# Altium PCB moveWiFi.PcbDoc
Units mil, origin at the board's own origin, x right, y up, seen from the top; angles counter-clockwise.
Board outline 2372.23 x 2949.09 mil, 2 copper layers (Top Layer, Bottom Layer); 30 components, 22 nets, 155 pads, 15 vias.
Unrouted connection lines stored in the file: 92.
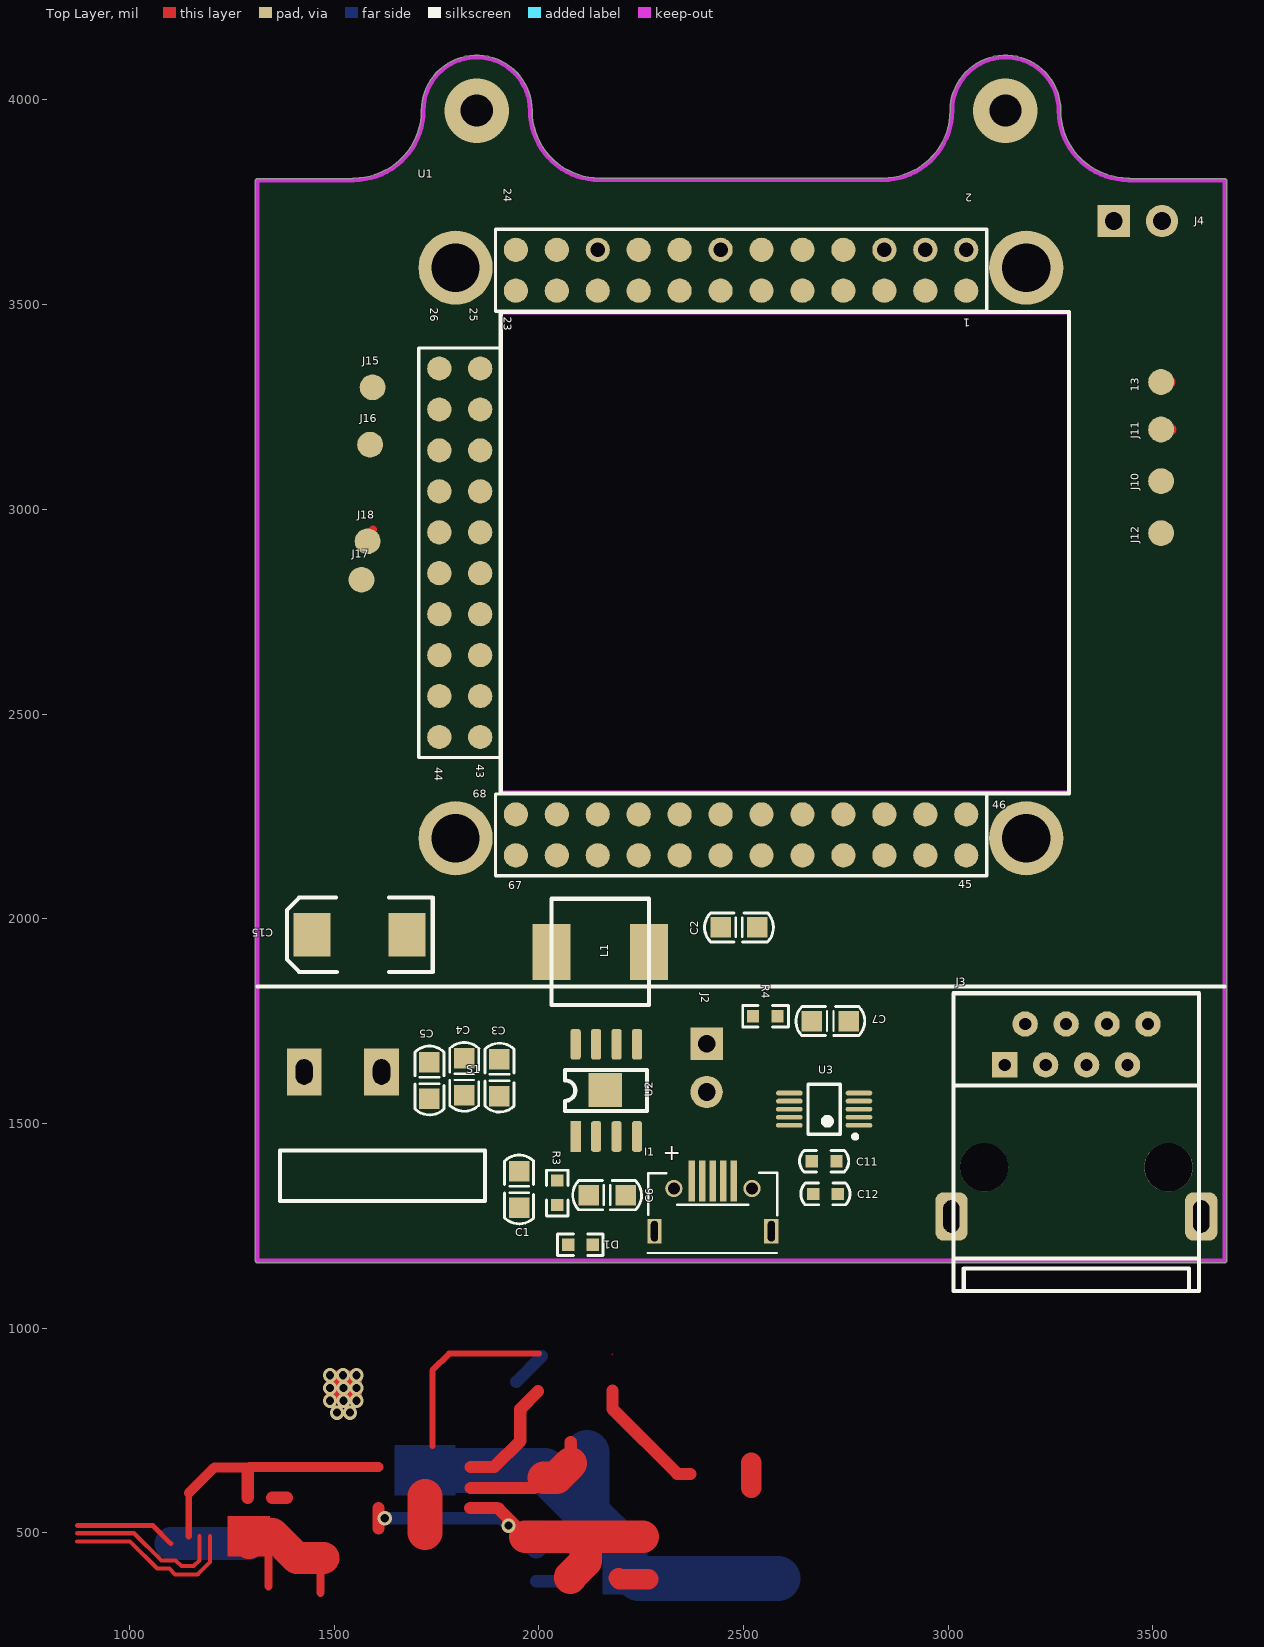
[diagram p0: Top Layer view]
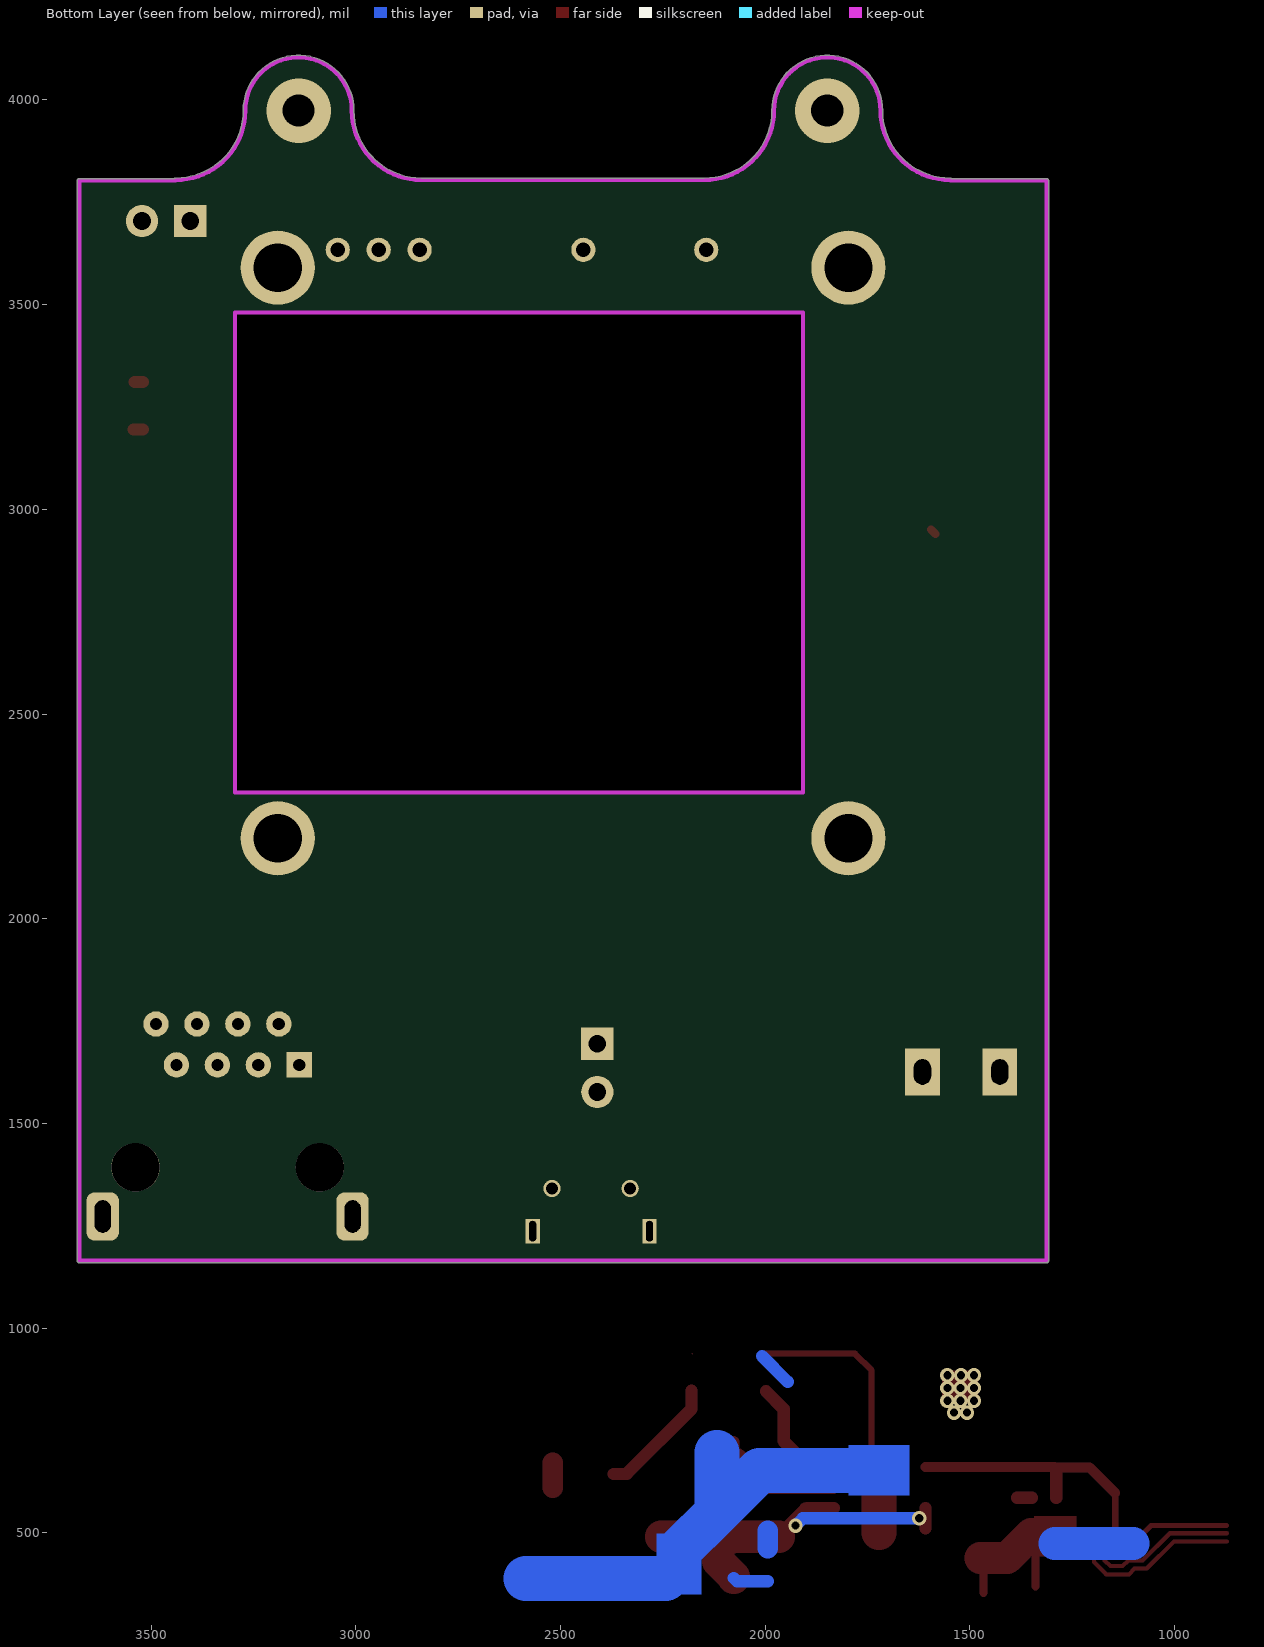
[diagram p1: Bottom Layer view, seen from below]

## Layer stack, top to bottom
Top Solder: solder mask 0.4, Solder Resist, Dk 3.5
Top Layer: signal copper 1.4
Dielectric 1: dielectric 12.6, FR-4, Dk 4.8
Bottom Layer: signal copper 1.4
Bottom Solder: solder mask 0.4, Solder Resist, Dk 3.5

## Board outline
1307.98,1165 ccw(c1313,1165) 1313,1159.98 3675.2,1159.98 ccw(c3675.2,1165) 3680.22,1165 ccw(c3675.2,1165) 3680.01,1166.42 3680.01,3802.8 ccw(c3675,3802.8) 3675,3807.81 3443.1,3807.81 ccw(c3439.7,3804.13) 3439.7,3809.14 cw(c3439.7,3974.05) 3274.79,3974.05 ccw(c3269.77,3974.05) 3274.79,3974.05 ccw(c3269.77,3974.05) 3274.79,3974.05 ccw(c3139.77,3974.05) 3004.76,3974.05 cw(c2839.77,3974.05) 2839.77,3809.07 2148.43,3809.07 cw(c2148.43,3974.05) 1983.45,3974.05 ccw(c1848.43,3974.05) 1713.42,3974.05 cw(c1548.43,3974.05) 1548.43,3809.07 ccw(c1548.43,3804.05) 1545.11,3807.81 1313,3807.81 ccw(c1313,3802.8) 1307.98,3802.8
cut-out: 1908,2308 1908,3481 3295,3481 3295,2308

## Design rules (kind name [scope] priority, off if disabled: settings)
Clearance [All] p1: gap=7 ignorepadtopadclearanceinfootprint=FALSE
ComponentClearance [All] p1: gap=0 collisioncheckmode=3 verticalgap=0 showdistances=FALSE
DiffPairsRouting [All] p1: maxlimit=10 minlimit=8 mostfreqgap=10 toplayer_minwidth=15 toplayer_maxwidth=15 toplayer_prefwidth=15 bottomlayer_minwidth=15 bottomlayer_maxwidth=15 bottomlayer_prefwidth=15 maxuncoupledlength=500
HoleSize [All] p1: absolutevalues=TRUE maxlimit=100 minlimit=12 maxpercent=80.000 minpercent=20.000
NetAntennae [All] p1: netantennaetolerance=10
PolygonConnect [All] p1: connectstyle=Relief reliefconductorwidth=10 reliefentries=4 polygonreliefangle="90 Angle" airgapwidth=10
RoutingVias [All] p1: holewidth=28 width=50 viastyle="Through Hole" minholewidth=28 minwidth=50 maxholewidth=28 maxwidth=50
SolderMaskExpansion [All] p1: expansion=4
Width [All] p1: maxlimit=200 minlimit=8 preferedwidth=10 minimp=50.000000 maximp=50.000000 favimp=50.000000
26 further rules are at their usual default settings.

## Components (designator, comment, footprint, x,y, rotation, side; value= is the part's Value field where it differs from the comment)
13 "PAD" PAD#1 3526,3311 r90 top
C1 "Cap Semi" C0805 1952,1294 r90 top value=10uF
C2 "Cap Semi" C0805 2534,1979 r180 top value=10uF
C3 "Cap Semi" C0805 1904,1567 r90 top value=22uF
C4 "Cap Semi" C0805 1818,1569 r90 top value=22uF
C5 "Cap Semi" C0805 1733,1560 r90 top value=22uF
C6 "Cap Semi" C0805 2212,1325 r180 top value=10uF
C7 "Cap Semi" C0805 2757,1750 r180 top value=10uF
C11 "Cap Semi" C0603 2667,1408 r0 top value=0.1uF
C12 "Cap Semi" C0603 2730,1328 r180 top value=0.1uF
C15 "Cap Pol2" C7343 1445.72,1961 r0 top value=220uF
D1 "LED2" R0603 2072,1204 r0 top
I1 "MicroUSB" MICROUSB 2425.28,1341.33 r270 top
J2 "Power" "Power 2" 2410,1695.11 r270 top
J3 "RJ45-1" RG45-3 3312.88,1393.08 r180 top
J4 "Power" "Power 2" 3404,3704 r0 top
J10 "PAD" PAD#2 3528,3069 r90 top
J11 "PAD" PAD#2 3528,3195 r90 top
J12 "PAD" PAD#3 3525,2942 r90 top
J15 "PAD" PAD#4 1594,3298 r0 top
J16 "PAD" PAD#4 1588,3158 r0 top
J17 "PAD" PAD#4 1567,2828 r0 top
J18 "PAD" PAD#5 1582,2927 r0 top
L1 "Inductor" L0630 2030.81,1919 r0 top value=1uH
R3 "Res2" R0603 2045,1301 r90 top value=2R
R4 "Res2" R0603 2583,1762 r180 top value=2R
S1 "Switch" SWITCHA2 1616,1626 r270 top
U1 "NanoPi NEO Core" NANOPI_NEO_CORE3 3281,3681 r270 top locked
U2 "IP5306" eSOP8 2162,1582 r90 top
U3 "CH340E" MSOP-10 2697,1535 r180 top

## Footprints (in the part's own frame and the unit in brackets; to place one, negate y for a bottom-side part, rotate by r counter-clockwise, add the part's x,y. Pads: shape width x height; smd on the part's side, far side on the other; paste and mask are expansions set on the pad)
C0603 [mil]
  rect 30x30 smd: 1(0,0) 2(60,0)
  silkscreen extent -30,-27 90,27, body extent -1,-16 62,15, height 24
C0805 [mil]
  rect 50x50 smd: 1(0,0) 2(90,0)
  silkscreen extent -39,-36 129,36, body extent 6,-24 85,23, height 47
C7343 [mm]
  rect 2.286x2.7 smd: 1(0,0) 2(5.9,0)
  silkscreen extent -1.55,-2.3 7.5,2.3, body extent -0.86,-2.33 6.74,2.27, height 3.1
eSOP8 [mil]
  round 20 on Top Overlay: 0(-29.5,59.8)
  rect 75x25 smd: 1(-113.5,72)
  rrect50% 75x25 smd: 2(-113.5,22) 3(-113.5,-28) 4(-113.5,-78) 5(111.5,-78) 6(111.5,-28) 7(111.5,22) 8(111.5,72)
  rect 82.28x82.28 smd: 9(0,0)
  silkscreen extent -52,-102 49,98, body extent -119,-99 117,93
L0630 [mm]
  rect 2.35x3.5 smd: 1(0,0) 2(6.05,0)
  silkscreen extent 0,-3.3 6.05,3.3
MICROUSB [mil]
  round 42 hole 29.53 unplated: 0(0,95.47) 0(0,-95.47)
  rect 60x35 hole 17 slot 50 at 0 deg: 0(104.33,142.72) 0(104.33,-142.72)
  rect 100x15.75 smd: 1(-18,-51.47) 2(-18,-25.87) 3(-18,-0.28) 4(-18,25.31) 5(-18,50.9)
  silkscreen extent -39,-160 158,157
MSOP-10 [mil]
  oval 65x11.81 smd: 1(-85,39.37) 2(-85,19.69) 3(-85,0) 4(-85,-19.68) 5(-85,-39.37) 6(85,-39.37) 7(85,-19.68) 8(85,0) 9(85,19.69) 10(85,39.37)
  silkscreen extent -81,-61 39,72, body extent -55,-61 55,61, height 79
NANOPI_NEO_CORE3 [mm]
  round 1.5 smd: 1(3.734,-6.02) 3(3.734,-8.56) 5(3.734,-11.1) 7(3.734,-13.64) 8(1.194,-13.64) 9(3.734,-16.18) 10(1.194,-16.18) 11(3.734,-18.72) 12(1.194,-18.72) 13(3.734,-21.26) 15(3.734,-23.8) 16(1.194,-23.8) 17(3.734,-26.34) 18(1.194,-26.34) 19(3.734,-28.88) 21(3.734,-31.42) 22(1.194,-31.42) 23(3.734,-33.96) 24(1.194,-33.96) 25(8.56,-36.17) 26(8.56,-38.71) 27(11.1,-36.17) 28(11.1,-38.71) 29(13.64,-36.17) 30(13.64,-38.71) 31(16.18,-36.17) 32(16.18,-38.71) 33(18.72,-36.17) 34(18.72,-38.71) 35(21.26,-36.17) 36(21.26,-38.71) 37(23.8,-36.17) 38(23.8,-38.71) 39(26.34,-36.17) 40(26.34,-38.71) 41(28.88,-36.17) 42(28.88,-38.71) 43(31.42,-36.17) 44(31.42,-38.71) 45(38.76,-6.02) 46(36.22,-6.02) 47(38.76,-8.56) 48(36.22,-8.56) 49(38.76,-11.1) 50(36.22,-11.1) 51(38.76,-13.64) 52(36.22,-13.64) 53(38.76,-16.18) 54(36.22,-16.18) 55(38.76,-18.72) 56(36.22,-18.72) 57(38.76,-21.26) 58(36.22,-21.26) 59(38.76,-23.8) 60(36.22,-23.8) 61(38.76,-26.34) 62(36.22,-26.34) 63(38.76,-28.88) 64(36.22,-28.88) 65(38.76,-31.42) 66(36.22,-31.42) 67(38.76,-33.96) 68(36.22,-33.96)
  round 1.5 hole 0.9: 2(1.194,-6.02) 4(1.194,-8.56) 6(1.194,-11.1) 14(1.194,-21.26) 20(1.194,-28.88)
  round 4.6 hole 3: 70(2.3,-2.3) 71(37.7,-2.3) 72(2.3,-37.7) 73(37.7,-37.7)
  silkscreen extent -0.08,-39.98 40.03,0.36
PAD#1 [mm]
  round 1.6 smd: 1(0,0.152)
PAD#2 [mm]
  round 1.6 smd: 1(0,0.203)
PAD#3 [mm]
  round 1.6 smd: 1(0,0.127)
PAD#4 [mm]
  round 1.6 smd: 1(0,0)
PAD#5 [mm]
  round 1.6 smd: 1(0,-0.127)
"Power 2" [mm]
  rect 2x2 hole 1.1: 1(0,0)
  round 2 hole 1.1: 2(3,0)
R0603 [mil]
  rect 30x30 smd: 1(0,0) 2(60,0)
  silkscreen extent -26,-26 85,26, body extent -1,-16 62,15, height 18
RG45-3 [mil]
  rrect50% 78.74x118.11 hole 78.74 slot 39.37 at 0 deg: 0(-305.12,120.08)
  round 118.11 hole 118.11: 0(-225,0) 0(225,0)
  rrect50% 78.74x118 hole 78.74 slot 39.37 at 0 deg: 0(305.12,120.08)
  rect 62x62 hole 30: 1(175,-250)
  round 62 hole 30: 2(125,-350) 3(75,-250) 4(25,-350) 5(-25,-250) 6(-75,-350) 7(-125,-250) 8(-175,-350)
  silkscreen extent -300,-425 300,302, body extent -348,-543 345,401, height 573
SWITCHA2 [mil]
  rect 115x85 hole 42 slot 62 at 0 deg: 1(0,0) 2(0,-188.98)
  silkscreen extent 192,-248 315,253

## Part data
C1 C2 C3 C4 C5 C6 C7 C11 C12: "Capacitor (Semiconductor SIM Model)", LatestRevisionDate=29-May-2009, LatestRevisionNote="IPC-7351 Footprint Added.", PackageDescription="Chip Capacitor", PackageReference=C1206, Published=8-Jun-2000, Publisher="Altium Limited"
C15: "Polarized Capacitor (Axial)", LatestRevisionDate=17-Jul-2002, LatestRevisionNote="Re-released for DXP Platform.", PackageDescription="Polarized Capacitor; 2 Leads", PackageReference=POLAR0.8, Published=8-Jun-2000, Publisher="Altium Limited"
D1: "Typical RED, GREEN, YELLOW, AMBER GaAs LED", LatestRevisionDate=17-Jul-2002, LatestRevisionNote="Re-released for DXP Platform.", PackageDescription="SM LED; 2 Flat Leads", PackageReference=3.2X1.6X1.1, PackageVersion=Feb-2002, Published=8-Jun-2000, Publisher="Altium Limited"
J3: library part RJ45-3
R3 R4: "Resistor", LatestRevisionDate=17-Jul-2002, LatestRevisionNote="Re-released for DXP Platform.", PackageDescription="Axial Device, Thru-Hole; 2 Leads; 0.4 in Pin Spacing", PackageReference=AXIAL-0.4, Published=8-Jun-2000, Publisher="Altium Limited"
S1: library part Switch2
U1: library part NanoPi_NEO_Core
L1: Code_IEC=1005, Code_JEITA=0402, LatestRevisionDate=29-May-2009, LatestRevisionNote="IPC-7351 Footprint Added.", PackageDescription="Chip Inductor", PackageReference=0402-A, Published=8-Jun-2000, Publisher="Altium Limited"

## Via types
v1: diameter 35, hole 20, Top Layer to Bottom Layer, 13 vias
v2: diameter 157.48, hole 78.74, Top Layer to Bottom Layer, 2 vias

## Nets (pads, with @x,y where several pads share a name; then routed paths per layer and width w, separated by ;. In a path a pad name is that pad's centre, name@x,y a point inside that pad or via, vN(x,y) a via of type N, cw(c..) or ccw(c..) an arc to the next point about the centre after c; other vN are vias at no path point)
GND: C1.1 C2.1 C3.1 C4.1 C5.1 C6.1 C7.1 C11.2 C12.1 C15.2 D1.2 I1.0 I1.5 J2.2 J4.2 U1.6 U1.14 U1.20 U1.67 U1.68 U2.9 U3.3 | length 2596
  Top Layer w0: 2178,938 2180,936
  Top Layer w12: 872.79,517.82 1057.71,517.82 1101.53,474
  Top Layer w15: 1740,712 1740,897 1781,938 2000,938
  Top Layer w20: 1339.72,369.67 1339.72,487.72 1348.82,496.82 ; 1467,354 1467,432.18 1473.82,439
  Top Layer w50: 2195.11,390 2198.11,387 2267,387
  Top Layer w75: 1292.47,474 1292.47,484.47 1304.82,496.82 1348.82,496.82
  Top Layer w78: 1350,498 1409,439 1473.82,439
  Top Layer w85: 1722,501 1722,589
  Bottom Layer w30: 1945,869 2008,932
  Bottom Layer w80: 1101.53,474 1292.47,474
  Bottom Layer w110: 1774,653 2014,653 2118,549 ; 2118,696 2118,549 ; 2210,457 2118,549 ; 2244,389 2584,389
  other v1: 1507,794 1539,794 1490,823 1523,823 1555,823 1490,854 1523,854 1555,854 1490,885 1522,885 1555,885
LAN_RX+: J17.1 U1.29
LAN_RX-: J18.1 U1.30 | length 15.6
  Top Layer w20: J18.1@1584,2940 1595,2951
LAN_TX+: J15.1 U1.27
LAN_TX-: J16.1 U1.28
Net13_1: 13.1 J3.1 | length 20
  Top Layer w30: 13.1 13.1@3540,3311
NetC1_2: C1.2 C12.2 I1.1 R3.2 U2.1 U3.7 | length 729.8
  Top Layer w16: 1145.53,492 1145.53,597.53
  Top Layer w25: 1145.53,597.53 1207.82,659.82 1296.82,659.82 1298,661 ; 1294,661 1298,661 ; 1608.5,661 1298,661
  Top Layer w30: 1289,586 1289,656
  Top Layer w50: 2519,610 2519,671
NetC2_2: C2.2 J2.1 L1.2 R4.2 U2.3 U2.4 U2.6 | length 1076.7
  Top Layer w0: 2254,491 2267,478
  Top Layer w30: 1608.5,511 1608.5,561 ; 1832.5,561 1833.5,561 ; 1836.5,561 1897,561 ; 1902,559 1967,494 ; 1968,490 1967,491 1967,494 ; 1969,492 1967,494
  Top Layer w50: 2068,381 2077,390
  Top Layer w79: 2077,390 2077,393.33 2115,431.33 2115,490 ; 2077,490 2078,491 2254,491
  Top Layer w80: 1967,491 2078,491 ; 2080,490 2115,490
  Bottom Layer w30: v1(1624,536) 1908,536 v1(1926,518) ; 1994,382 2069,382 2077,390
NetC3_2: C3.2 C4.2 C5.2 S1.1 U2.8 | length 583.3
  Top Layer w30: 1833.5,661 1891,661 ; 1892,661 1891,661 ; 1998,846 1955,803 1955,725 1891,661 ; 2180,803 2338,645 ; 2180,808 2180,848 ; 2338,644 2370.02,644
NetC6_2: C6.2 R3.1 | length 35.2
  Top Layer w30: 1349,586 1384.25,586
NetC7_2: C7.2 R4.1 | length 42
  Bottom Layer w50: 1994,463 1994,505
NetC11_1: C11.1 U3.10
NetC15_1: C15.1 J4.1 S1.2 U1.2 U1.4 U1.66
NetD1_1: D1.1 U2.2
NetJ3_2: J3.2 J12.1
NetJ3_3: J3.3 J11.1 | length 23
  Top Layer w30: J11.1 J11.1@3543,3195
NetJ3_6: J3.6 J10.1
NetL1_1: L1.1 U2.7 | length 321.7
  Top Layer w30: 1833.5,610 1989,610 ; 1989,611 2013,635 ; 2078,669 2078,722.19
  Top Layer w80: 2013,635 2044,635 ; 2044,636 2078,670
RXD0: U1.62 U3.8
TXD0: U1.64 U3.9
UD+: I1.3 U3.1 | length 432.9
  Top Layer w10: 872.79,479.63 1001.37,479.63 1068.18,412.82 1098.18,412.82 1112,399 1167,399 1196.72,428.72 1196.72,492
UD-: I1.2 U3.2 | length 396.3
  Top Layer w10: 872.79,499.31 1011.69,499.31 1078.18,432.82 1113.18,432.82 1127,419 1157,419 1171.13,433.13 1171.13,492
pads on no net: I1.4 J3.0 J3.4 J3.5 J3.7 J3.8 U1.1 U1.3 U1.5 U1.7 U1.8 U1.9 U1.10 U1.11 U1.12 U1.13 U1.15 U1.16 U1.17 U1.18 U1.19 U1.21 U1.22 U1.23 U1.24 U1.25 U1.26 U1.31 U1.32 U1.33 U1.34 U1.35 U1.36 U1.37 U1.38 U1.39 U1.40 U1.41 U1.42 U1.43 U1.44 U1.45 U1.46 U1.47 U1.48 U1.49 U1.50 U1.51 U1.52 U1.53 U1.54 U1.55 U1.56 U1.57 U1.58 U1.59 U1.60 U1.61 U1.63 U1.65 U1.70 U1.71 U1.72 U1.73 U2.0 U2.5 U3.4 U3.5 U3.6
copper on no net:
  other v2: 1848.43,3974.05 3139.77,3974.05

## Polygon pours and split planes (outlines as drawn)
no net on Top Layer "Top Layer-No Net 2" (solid, pour order 30): 3595.29,3135.12
no net on Top Layer "Top Layer-No Net 2" (solid, pour order 6): 1312,3135
no net on Top Layer "Top Layer-No Net" (solid, pour order 2): 1242,544
no net on Top Layer "Top Layer-No Net 1" (solid, pour order 0): 1242,544

## Keep-outs
Keep-Out Layer:
  lines w0: 3596,1165 3597,1166
  lines w10: 1547.17,3802.8 1313,3802.8 1313,1165 3675.2,1165 ; 1548.43,3804.05 ccw(c1548.43,3974.05) 1718.43,3974.05 cw(c1848.43,3974.05) 1978.43,3974.05 ccw(c2148.43,3974.05) 2148.43,3804.05 2839.77,3804.05 ccw(c2839.77,3974.05) 3009.77,3974.05 cw(c3139.77,3974.05) 3269.77,3974.05 ccw(c3439.7,3974.05) 3439.7,3804.13 ; 3439.7,3802.8 3675,3802.8 3675,1165 ; 1908,2308 1908,3481 3295,3481 3295,2308 1908,2308 ; 1908,2308 1908,2308

## Other copper
Top Layer:
  rectangle net GND: 1480,817 1568,897
  rectangle net GND: 1240,442 1343,542
Bottom Layer:
  rectangle net GND: 2156,350 2265,499
  rectangle net GND: 1648,591 1796,715

## Silkscreen, mask and mechanical layers (free items; w line width, h text height)
Top Overlay:
  lines w10: 1313,1834.29 3675.2,1834.29
Top Solder:
  rectangle: 1243,518 1290,546
  lines w16: 1145.53,492 1145.53,597.53
  lines w25: 1145.53,597.53 1207.82,659.82 1292.82,659.82 1294,661 1608.5,661
  lines w30: 1833.5,561 1897,561 ; 1833.5,611 1989,611 ; 1833.5,661 1892,661 1955,724 1955,802 2000,847 ; 1900,561 1967,494 ; 2180,846 2180,802 2338,644
  lines w80: 1973,490 2077,490 ; 2013,635 2044,635 2078,669

## Text inside footprints (layer, text, board x,y; h text height)
I1: Top Overlay "+" at 2303.28,1410.33 h39.37
U1: Top Overlay "67" at 1925,2072 h20; Top Overlay "68" at 1839,2296 h20; Top Overlay "45" at 3024,2075 h20; Top Overlay "46" at 3108,2269 h20; Top Overlay "43" at 1847,2377 h20 r270; Top Overlay "44" at 1746,2370 h20 r270; Top Overlay "26" at 1735,3492 h20 r270; Top Overlay "25" at 1831,3492 h20 r270; Top Overlay "2" at 3059,3771 h20 r180; Top Overlay "1" at 3054,3466 h20 r180; Top Overlay "24" at 1915,3784 h20 r270; Top Overlay "23" at 1915,3471 h20 r270